# Altium PCB PCB_Medical_V2_2_2022-05-04.pcbdoc
Units mil, origin at the board's own origin, x right, y up, seen from the top; angles counter-clockwise.
Board outline 3436 x 4186 mil, 2 copper layers (Top Layer, Bottom Layer); 107 components, 72 nets, 382 pads, 205 vias.
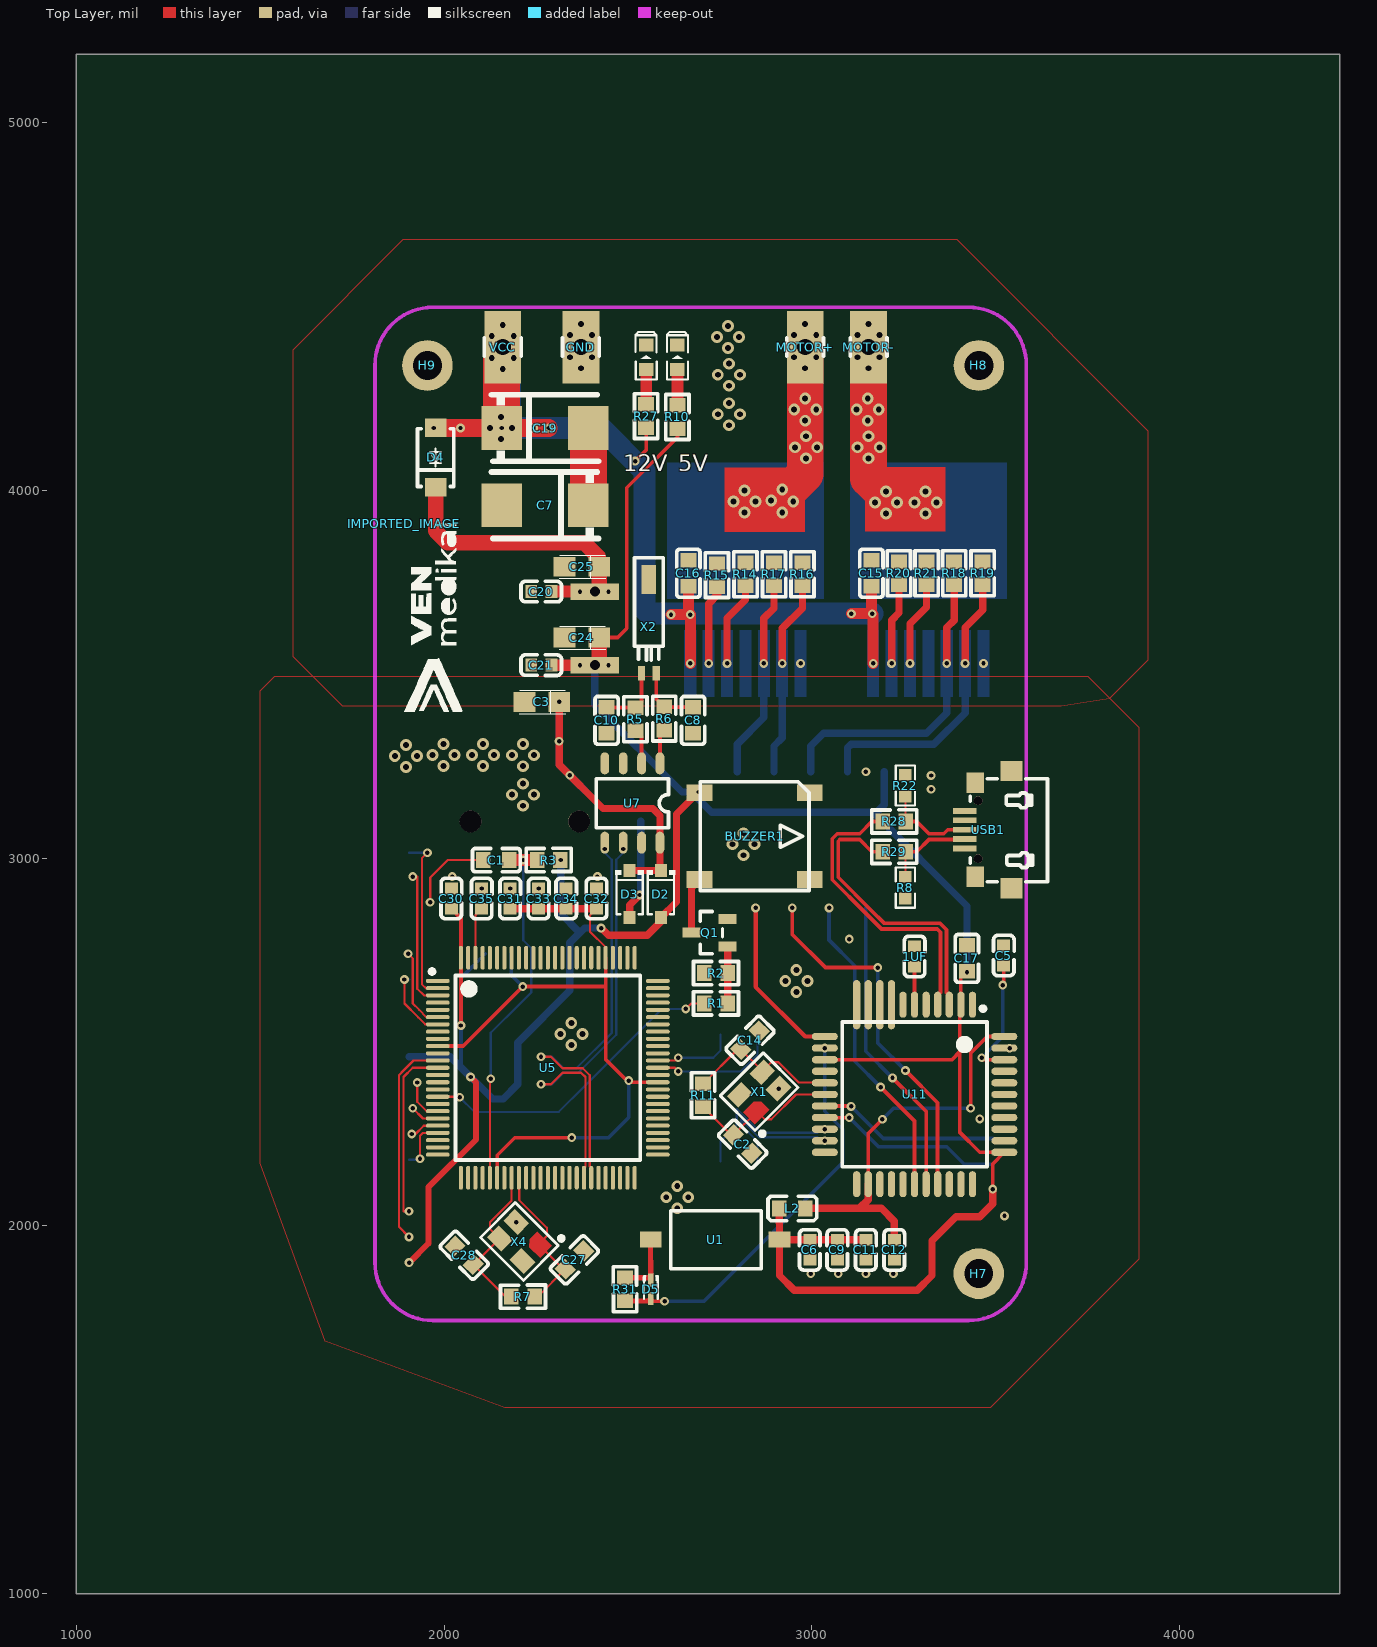
[diagram p0: Top Layer view]
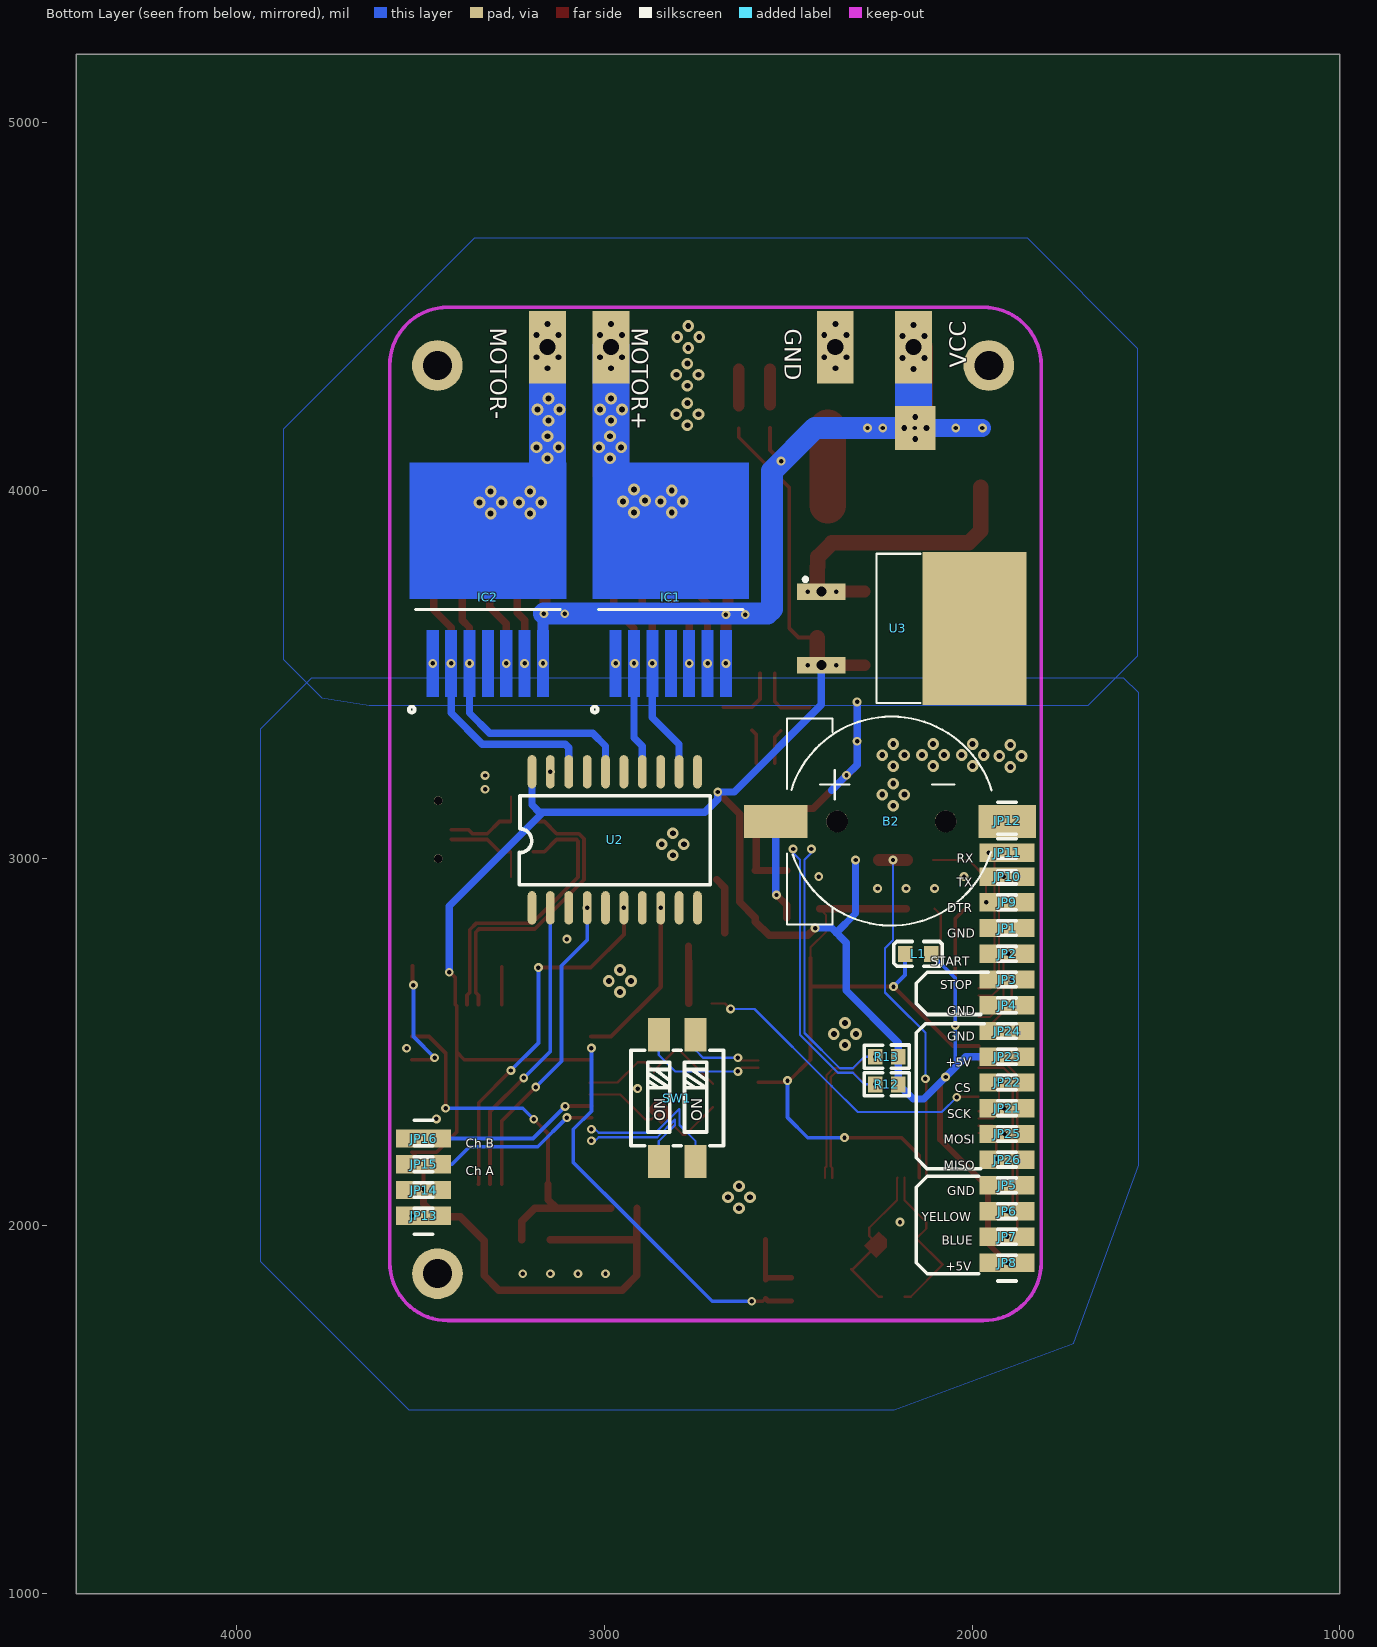
[diagram p1: Bottom Layer view, seen from below]

## Layer stack, top to bottom
Top Layer: signal copper (thickness not stored)
Dielectric: dielectric 12.6, FR-4, Dk 4.8
Bottom Layer: signal copper (thickness not stored)

## Board outline
4436,1000 1000,1000 1000,5186 4436,5186

## Components (designator, comment, footprint, x,y, rotation, side; value= is the part's Value field where it differs from the comment)
1UF "1uF" C0603#1 3279.5,2732.5 r270 top
5V "LED-0603_R" LED0603_RED 2634.5,4362.5 r90 top
12V "LED-0603_R" LED0603_RED 2549.5,4362.5 r90 top
B2 "CR1220-2" BAT-SMD_CR1220-2 2219.5,3100 r0 bottom
BUZZER1 "BUZZER 7.5X7.5X2.5MM" SMD-BUZZER-7.5X7.5X2.5 2844.5,3060 r0 top
C1 "100n" C0603#2 2142,2995 r180 top
C2 "22p" C0603#2 2812,2222.5 r135 top
C3 "10uF" CASE-A_3216 2265.59,3425 r180 top
C5 "100n" C0603#1 3522,2735 r270 top
C6 "100n" C0603#1 2994.5,1935 r90 top
C7 "220uF" CASE-D_7343 2274.5,3960 r0 top
C8 "10p" C0603#2 2677,3375 r90 top
C9 "100n" C0603#1 3069.5,1935 r90 top
C10 "10p" C0603#2 2442,3375 r90 top
C11 "100n" C0603#1 3147,1935 r90 top
C12 "10u" C0603#1 3224.5,1935 r90 top
C14 "22p" C0603#2 2832,2505 r225 top
C15 "470n" C0603#2 3162.05,3774.99 r270 top
C16 "470n" C0603#2 2664.5,3775 r270 top
C17 "100n" C0603#2 3422,2727.5 r90 top
C19 "220uF" CASE-D_7343 2274.5,4170 r180 top
C20 "100n" C0603#1 2264.5,3725 r0 top
C21 "100n" C0603#1 2264.5,3525 r0 top
C24 "0.33uF" CASE-A_3216 2374.5,3600 r180 top
C25 "0.1uF" CASE-A_3216 2374.5,3792.5 r180 top
C27 "22p" C0603#2 2354.5,1907.5 r225 top
C28 "22p" C0603#2 2054.5,1920 r315 top
C30 "10u" C0603#1 2019.5,2890 r270 top
C31 "100nF" C0603#1 2179.5,2890 r270 top
C32 "100nF" C0603#1 2414.5,2890 r270 top
C33 "100nF" C0603#1 2257,2890 r270 top
C34 "100nF" C0603#1 2332,2890 r270 top
C35 "100nF" C0603#1 2102,2890 r270 top
D2 "1N4148W" SOD-123_L3.1-W1.7-LS3.7-RD 2589.5,2902.5 r270 top
D3 "1N4148W" SOD-123_L3.1-W1.7-LS3.7-RD 2504.5,2902.5 r270 top
D4 "M7" SMA(DO-214AC) 1977,4090 r270 top
D5 "MMBD4148TS" SOD-523_L1.2-W0.8-LS1.6-RD 2562,1827.5 r270 top
GND "M01PTH_LONGPAD" 1X01_LONGPAD#1 2372,4390 r0 top
H7 "3_2MMMOUNTHOLE COPY" HOLE_2 3454,1870 r0 top
H8 "3_2MMMOUNTHOLE COPY" HOLE_2 3454.5,4340 r0 top
H9 "3_2MMMOUNTHOLE COPY" HOLE_2 1954.5,4340 r0 top
IC1 "BTS7960B-BTS7960B" PG-TO263-7 2869.5,3690 r180 bottom
IC2 "BTS7960B-BTS7960B" PG-TO263-7 3367,3690 r180 bottom
IMPORTED_IMAGE "IMPORTED_IMAGE" IMPORTED_IMAGE 1892.17,3910.12 r0 top
JP1 "M01PTH_LONGPAD" 1X01_LONGPAD#2 1904.91,2810 r90 bottom
JP2 "M01PTH_LONGPAD" 1X01_LONGPAD#2 1904.91,2740 r90 bottom
JP3 "M01PTH_LONGPAD" 1X01_LONGPAD#2 1904.91,2670 r90 bottom
JP4 "M01PTH_LONGPAD" 1X01_LONGPAD#2 1904.91,2600 r90 bottom
JP5 "M01PTH_LONGPAD" 1X01_LONGPAD#2 1904.91,2110 r90 bottom
JP6 "M01PTH_LONGPAD" 1X01_LONGPAD#2 1904.91,2040 r270 bottom
JP7 "M01PTH_LONGPAD" 1X01_LONGPAD#2 1904.91,1970 r270 bottom
JP8 "M01PTH_LONGPAD" 1X01_LONGPAD#2 1904.91,1900 r270 bottom
JP9 "M01PTH_LONGPAD" 1X01_LONGPAD#2 1904.91,2880 r270 bottom
JP10 "M01PTH_LONGPAD" 1X01_LONGPAD#2 1904.91,2950 r270 bottom
JP11 "M01PTH_LONGPAD" 1X01_LONGPAD#2 1904.91,3015 r270 bottom
JP12 "M01PTH_LONGPAD" 1X01_LONGPAD#2 1904.91,3102.5 r270 bottom
JP13 "M01PTH_LONGPAD" 1X01_LONGPAD#2 3492,2027.5 r90 bottom
JP14 "M01PTH_LONGPAD" 1X01_LONGPAD#2 3492,2097.5 r90 bottom
JP15 "M01PTH_LONGPAD" 1X01_LONGPAD#2 3492,2167.5 r90 bottom
JP16 "M01PTH_LONGPAD" 1X01_LONGPAD#2 3492,2237.5 r90 bottom
JP21 "M01PTH_LONGPAD" 1X01_LONGPAD#2 1904.91,2320 r270 bottom
JP22 "M01PTH_LONGPAD" 1X01_LONGPAD#2 1904.91,2390 r270 bottom
JP23 "M01PTH_LONGPAD" 1X01_LONGPAD#2 1904.91,2460 r270 bottom
JP24 "M01PTH_LONGPAD" 1X01_LONGPAD#2 1904.91,2530 r270 bottom
JP25 "M01PTH_LONGPAD" 1X01_LONGPAD#2 1904.91,2250 r270 bottom
JP26 "M01PTH_LONGPAD" 1X01_LONGPAD#2 1904.91,2180 r270 bottom
L1 "10uH" L0603#1 2147,2740 r0 bottom
L2 "30mOhm" L0603#2 2947,2047.5 r180 top
MOTOR+ "M01PTH_LONGPAD" 1X01_LONGPAD#1 2982,4390 r0 top
MOTOR- "M01PTH_LONGPAD" 1X01_LONGPAD#1 3154.5,4390 r0 top
Q1 "2222ALT1G" SOT-23-3_L2.9-W1.3-P1.90-LS2.4-BR 2722,2797.5 r0 top
R1 "820" R0603#1 2739.5,2605 r0 top
R2 "47k" R0603#1 2739.5,2687.5 r0 top
R3 "10k" R0603#1 2284.5,2995 r0 top
R5 "40.2k" R0603#1 2520.2,3377.93 r270 top
R6 "40.2k" R0603#1 2598.6,3379.77 r270 top
R7 "1M" R0603#1 2214.5,1807.5 r180 top
R8 "CG0603MLC-05E" R0603#2 3254.5,2920 r270 top
R10 "1k" R0603#1 2634.5,4200 r90 top
R11 "1M" R0603#1 2704.5,2355 r90 top
R12 "10k" R0603#3 2232,2385 r0 bottom
R13 "10k" R0603#3 2232,2460 r0 bottom
R14 "10k" R0603#1 2819.5,3772.5 r270 top
R15 "10k" R0603#1 2742,3770 r270 top
R16 "10k" R0603#1 2974.5,3772.5 r270 top
R17 "10k" R0603#1 2897,3772.5 r270 top
R18 "10k" R0603#1 3387,3775 r270 top
R19 "10k" R0603#1 3464.5,3775 r270 top
R20 "10k" R0603#1 3237,3775 r270 top
R21 "10k" R0603#1 3312,3775 r270 top
R22 "CG0603MLC-05E" R0603#2 3254.5,3197.5 r90 top
R27 "1k" R0603#1 2549.5,4202.5 r90 top
R28 "22" R0603#1 3224.5,3100 r180 top
R29 "22" R0603#1 3224.5,3017.5 r180 top
R31 "10k" R0603#1 2492,1827.5 r90 top
SW1 "DM-02-V" SW-SMD_DM-02-V 2802,2347.5 r180 bottom
U1 "DM-01-V" DM-01-V 2912,1962.5 r90 top
U2 "74HC244D,653" SOIC-20_L13.0-W7.6-P1.27-LS10.6-BL 2972,3050 r0 bottom
U3 "L7805CD2T-TR" TO-263-2_L10.0-W9.1-P5.08-LS15.2-TL 2202,3625 r0 bottom
U5 "ATMEGA2560-16AU" TQFP-100_L14.0-W14.0-P0.50-LS16.0-BL 2282,2430 r270 top
U7 "PCF8563T/5,518" SOIC-8_L5.0-W4.0-P1.27-LS6.0-BL 2512,3150 r180 top
U11 "ATMEGA32U4-AU" QFP-44_L10.0-W10.0-P0.80-LS13.2-BL 3279.5,2357.5 r180 top
USB1 "U-F-M5SS-W-3" MICRO-USB-SMD_MICRO-USB-A11 3479.5,3077.5 r90 top
VCC "M01PTH_LONGPAD" 1X01_LONGPAD#1 2159.5,4390 r0 top
X1 "16MHz" OSC-SMD_4P-L3.2-W2.5-BL 2857,2365 r45 top
X2 "32.768KHz" OSC-TH_BD2.0-P0.70-D0.3 2557,3517.5 r270 top
X4 "16MHz" OSC-SMD_4P-L3.2-W2.5-BL 2204.5,1957.5 r135 top

## Footprints (in the part's own frame and the unit in brackets; to place one, negate y for a bottom-side part, rotate by r counter-clockwise, add the part's x,y. Pads: shape width x height; smd on the part's side, far side on the other; paste and mask are expansions set on the pad)
1X01_LONGPAD#1 [mil]
  rect 100x196.85 hole 44: 1(0,0)
  silkscreen extent -50,-25 50,25
1X01_LONGPAD#2 [mil]
  rect 50x150 smd: 1(0,0)
  silkscreen extent -50,-25 50,25
BAT-SMD_CR1220-2 [mm]
  rect 4.4x2.3 smd: 1(8,0)
  rect 4x2.3 smd: 2(-8,0)
  round 1.5 hole 1.5 unplated: ""(-3.75,0) ""(3.75,0)
  silkscreen extent -6.92,-7.25 7.22,7.19
C0603#1 [mm]
  rect 0.8x0.9 smd: 1(-0.7,0) 2(0.7,0)
  silkscreen extent -1.41,-0.71 1.39,0.72
C0603#2 [mm]
  rect 1x1.1 smd: 1(-0.9,0) 2(0.9,0)
  silkscreen extent -1.65,-0.8 1.65,0.8
CASE-A_3216 [mil]
  rect 59.05x53.5 smd: 1(-47.24,0) 2(47.25,0)
  silkscreen extent -65,-30 61,33
CASE-D_7343 [mil]
  rect 110.2x118.5 smd: 1(118.11,0) 2(-118.11,0)
  silkscreen extent -146,-91 146,91
DM-01-V [mm]
  rect 1.1x1.5 smd: 1(0,0) 2(0,8.9)
  silkscreen extent -2,1.25 2,7.5
HOLE_2 [mm]
  round 3.5 hole 2: 1(0,0)
IMPORTED_IMAGE [mil]
  silkscreen extent 0,-512 157,0
L0603#1 [mm]
  rect 1x1.1 smd: 1(0.9,0) 2(-0.9,0)
  silkscreen extent -1.68,-0.85 1.68,0.85
L0603#2 [mm]
  rect 1x1.1 smd: 1(-0.9,0) 2(0.9,0)
  silkscreen extent -1.68,-0.85 1.68,0.85
LED0603_RED [mm]
  rect 0.9x1 smd: 1(-0.85,0) 2(0.85,0)
  silkscreen extent -1.54,-0.73 1.75,0.73
MICRO-USB-SMD_MICRO-USB-A11 [mm]
  rect 0.4x1.6 smd: 1(-1.3,1.616) 2(-0.65,1.616) 3(0,1.616) 4(0.65,1.616) 5(1.3,1.616)
  rect 1.4x1.2 smd: 6(3.25,0.893) 7(-3.25,0.893)
  rect 1.4x1.5 smd: 8(-4.051,-1.617) 9(4.051,-1.617)
  round 0.6 hole 0.6 unplated: ""(-2,0.694) ""(2,0.694)
  silkscreen extent -3.59,-4.1 3.52,1.24
OSC-SMD_4P-L3.2-W2.5-BL [mm]
  round 0 smd: 1(-1.1,-0.8)
  rect 1.4x1.15 smd: 2(1.1,-0.8) 3(1.1,0.8) 4(-1.1,0.8)
  Top Layer region: -1.8,-0.225 -0.762,-0.225 -0.4,-0.604 -0.4,-1.375 -1.8,-1.375
  silkscreen extent -2.1,-2.35 2.1,1.7
OSC-TH_BD2.0-P0.70-D0.3 [mm]
  rect 1x0.5 smd: 1(0.381,0.508) 2(0.381,-0.508)
  rect 2x1 smd: ""(-6.096,0)
  silkscreen extent -7.6,-1 -0.54,1
PG-TO263-7 [mil]
  round 0 smd: 1(-99.99,-160.24) 2(-49.99,-160.24) 3(0.01,-160.24) 4(50.01,-160.24) 5(100.01,-160.24) 6(150.01,-160.24) 7(200.01,-160.24) 8(50.01,199.99)
  Top Layer region: -115.74,-69.69 -84.24,-69.69 -84.24,-250.79 -115.74,-250.79
  Top Layer region: -65.74,-69.69 -34.24,-69.69 -34.24,-250.79 -65.74,-250.79
  Top Layer region: -15.74,-69.69 15.76,-69.69 15.76,-250.79 -15.74,-250.79
  Top Layer region: 34.26,-69.69 65.76,-69.69 65.76,-250.79 34.26,-250.79
  Top Layer region: 84.26,-69.69 115.76,-69.69 115.76,-250.79 84.26,-250.79
  Top Layer region: 134.26,-69.69 165.76,-69.69 165.76,-250.79 134.26,-250.79
  Top Layer region: 184.26,-69.69 215.76,-69.69 215.76,-250.79 184.26,-250.79
  Top Layer region: -162.59,14.95 -162.59,385.03 262.61,385.03 262.61,14.95
  silkscreen extent -165,-294 247,-14
QFP-44_L10.0-W10.0-P0.80-LS13.2-BL [mm]
  oval 0.5x1.8 smd: 1(-4,-6.2) 2(-3.2,-6.2) 3(-2.4,-6.2) 4(-1.6,-6.2) 5(-0.8,-6.2) 6(0,-6.2) 7(0.8,-6.2) 23(4,6.2) 24(3.2,6.2) 25(2.4,6.2) 26(1.6,6.2) 27(0.8,6.2) 28(0,6.2) 29(-0.8,6.2) 30(-1.6,6.2) 31(-2.4,6.2) 32(-3.2,6.2) 33(-4,6.2)
  oval 0.5x3.4 smd: 8(1.6,-6.2) 9(2.4,-6.2) 10(3.2,-6.2) 11(4,-6.2)
  oval 1.8x0.5 smd: 12(6.2,-4) 13(6.2,-3.2) 14(6.2,-2.4) 15(6.2,-1.6) 16(6.2,-0.8) 17(6.2,0) 18(6.2,0.8) 19(6.2,1.6) 20(6.2,2.4) 21(6.2,3.2) 22(6.2,4) 34(-6.2,4) 35(-6.2,3.2) 36(-6.2,2.4) 37(-6.2,1.6) 38(-6.2,0.8) 39(-6.2,0) 40(-6.2,-0.8) 41(-6.2,-1.6) 42(-6.2,-2.4) 43(-6.2,-3.2) 44(-6.2,-4)
  silkscreen extent -5,-6.08 5,5
R0603#1 [mm]
  rect 1x1.1 smd: 1(-0.8,0) 2(0.8,0)
  silkscreen extent -1.55,-0.8 1.55,0.81
R0603#2 [mm]
  rect 0.806x0.864 smd: 1(-0.753,0) 2(0.753,0)
  silkscreen extent -1.39,-0.66 1.39,0.66
R0603#3 [mm]
  rect 1x1.1 smd: 1(0.8,0) 2(-0.8,0)
  silkscreen extent -1.55,-0.81 1.55,0.8
SMA(DO-214AC) [mil]
  rect 50x57.9 smd: 1(-81,0) 2(81,0)
  silkscreen extent -78,-49 79,49
SMD-BUZZER-7.5X7.5X2.5 [mm]
  rect 1.78x1.15 smd: 1(-3.8,3) 2(-3.8,-3) 3(3.8,-3) 4(3.8,3)
  silkscreen extent -3.75,-3.75 3.75,3.75
SOD-123_L3.1-W1.7-LS3.7-RD [mm]
  rect 0.91x0.84 smd: 1(-1.63,0) 2(1.63,0)
  silkscreen extent -1.63,-0.98 1.4,0.98
SOD-523_L1.2-W0.8-LS1.6-RD [mm]
  rect 0.93x0.36 smd: 1(-0.635,0) 2(0.635,0)
  silkscreen extent -0.91,-0.55 0.68,0.55
SOIC-8_L5.0-W4.0-P1.27-LS6.0-BL [mm]
  oval 0.6x1.52 smd: 1(-1.905,-2.74) 2(-0.635,-2.74) 3(0.635,-2.74) 4(1.905,-2.74) 5(1.905,2.74) 6(0.635,2.74) 7(-0.635,2.74) 8(-1.905,2.74)
  silkscreen extent -2.49,-1.67 2.5,1.7
SOIC-20_L13.0-W7.6-P1.27-LS10.6-BL [mm]
  oval 0.6x2.3 smd: 1(5.715,4.7) 2(4.445,4.7) 3(3.175,4.7) 4(1.905,4.7) 5(0.635,4.7) 6(-0.635,4.7) 7(-1.905,4.7) 8(-3.175,4.7) 9(-4.445,4.7) 10(-5.715,4.7) 11(-5.715,-4.7) 12(-4.445,-4.7) 13(-3.175,-4.7) 14(-1.905,-4.7) 15(-0.635,-4.7) 16(0.635,-4.7) 17(1.905,-4.7) 18(3.175,-4.7) 19(4.445,-4.7) 20(5.715,-4.7)
  silkscreen extent -6.6,-3.05 6.6,3.1
SOT-23-3_L2.9-W1.3-P1.90-LS2.4-BR [mm]
  rect 1.25x0.7 smd: 1(1.25,-0.95) 2(1.25,0.95) 3(-1.25,0)
  silkscreen extent -0.65,-1.46 0.9,1.46
SW-SMD_DM-02-V [mil]
  rect 60x90 smd: 1(50,172.24) 2(-50,172.24) 3(-50,-172.24) 4(50,-172.24)
  silkscreen extent -126,-130 126,130
TO-263-2_L10.0-W9.1-P5.08-LS15.2-TL [mil]
  rect 132.23x44.65 hole 26.8: 1(208.1,-100) 3(208.1,100)
  rect 282.7x416 smd: 4(-208.1,0)
  silkscreen extent -61,-203 256,203
TQFP-100_L14.0-W14.0-P0.50-LS16.0-BL [mm]
  oval 0.28x1.65 smd: 1(-6,-7.6) 2(-5.5,-7.6) 3(-5,-7.6) 4(-4.5,-7.6) 5(-4,-7.6) 6(-3.5,-7.6) 7(-3,-7.6) 8(-2.5,-7.6) 9(-2,-7.6) 10(-1.5,-7.6) 11(-1,-7.6) 12(-0.5,-7.6) 13(0,-7.6) 14(0.5,-7.6) 15(1,-7.6) 16(1.5,-7.6) 17(2,-7.6) 18(2.5,-7.6) 19(3,-7.6) 20(3.5,-7.6) 21(4,-7.6) 22(4.5,-7.6) 23(5,-7.6) 24(5.5,-7.6) 25(6,-7.6) 51(6,7.6) 52(5.5,7.6) 53(5,7.6) 54(4.5,7.6) 55(4,7.6) 56(3.5,7.6) 57(3,7.6) 58(2.5,7.6) 59(2,7.6) 60(1.5,7.6) 61(1,7.6) 62(0.5,7.6) 63(0,7.6) 64(-0.5,7.6) 65(-1,7.6) 66(-1.5,7.6) 67(-2,7.6) 68(-2.5,7.6) 69(-3,7.6) 70(-3.5,7.6) 71(-4,7.6) 72(-4.5,7.6) 73(-5,7.6) 74(-5.5,7.6) 75(-6,7.6)
  oval 1.65x0.28 smd: 26(7.6,-6) 27(7.6,-5.5) 28(7.6,-5) 29(7.6,-4.5) 30(7.6,-4) 31(7.6,-3.5) 32(7.6,-3) 33(7.6,-2.5) 34(7.6,-2) 35(7.6,-1.5) 36(7.6,-1) 37(7.6,-0.5) 38(7.6,0) 39(7.6,0.5) 40(7.6,1) 41(7.6,1.5) 42(7.6,2) 43(7.6,2.5) 44(7.6,3) 45(7.6,3.5) 46(7.6,4) 47(7.6,4.5) 48(7.6,5) 49(7.6,5.5) 50(7.6,6) 76(-7.6,6) 77(-7.6,5.5) 78(-7.6,5) 79(-7.6,4.5) 80(-7.6,4) 81(-7.6,3.5) 82(-7.6,3) 83(-7.6,2.5) 84(-7.6,2) 85(-7.6,1.5) 86(-7.6,1) 87(-7.6,0.5) 88(-7.6,0) 89(-7.6,-0.5) 90(-7.6,-1) 91(-7.6,-1.5) 92(-7.6,-2) 93(-7.6,-2.5) 94(-7.6,-3) 95(-7.6,-3.5) 96(-7.6,-4) 97(-7.6,-4.5) 98(-7.6,-5) 99(-7.6,-5.5) 100(-7.6,-6)
  silkscreen extent -6.8,-8.15 6.37,6.37

## Free pads (board coordinates)
  rect 110.2x118.5 smd far side: 1(2154.5,4170)

## Via types
v1: diameter 32, hole 16, Top Layer to Bottom Layer, tented both sides, 108 vias
v2: diameter 24, hole 12, Top Layer to Bottom Layer, tented both sides, 97 vias

## Nets (pads, with @x,y where several pads share a name; then routed paths per layer and width w, separated by ;. In a path a pad name is that pad's centre, name@x,y a point inside that pad or via, vN(x,y) a via of type N, cw(c..) or ccw(c..) an arc to the next point about the centre after c; other vN are vias at no path point)
+5V: BUZZER1.1 C6.2 C9.2 C11.2 C17.1 C21.2 C24.1 C30.2 D2.2 JP8.1 JP14.1 JP23.1 L1.2 L2.2 R3.2 R10.1 R12.2 R13.2 U1.1 U2.20 U3.3 U5.100 U11.2 U11.14 U11.34 | length 7870.8
  Top Layer w10: C30.2 2045.78,2836.16 U5.100 v2(2045.78,2545) ; C24.1 2472,3600 2497,3625 2497,4007.5 2634.5,4145 R10.1 ; U11.14 3381.09,2451.99 3402,2472.9 ; C17.1 3405.48,2675.55 U11.2 3402,2598.11 3402,2255 3456.98,2200.02 U11.34 3492,2168.43 v2(3492,2100)
  Top Layer w16: v2(1904.91,1900) 1957,1952.1 1957,2105 2087,2235 2087,2350 2087,2390 v2(2072,2405)
  Top Layer w20: R3.2 v2(2317,2995) ; v2(2427,2810) 2447,2790 2552,2790 2589.5,2827.5 D2.2 2632,2880.82 2632,3120 v2(2692,3180) ; L2.2 U1.1 ; C6.2 C9.2 C11.2 ; C6.2 U1.1 ; v2(3422,2690) C17.1 ; v2(3492,2100) 3492,2060 3457,2025 3392,2025 3327,1960 3327,1865 3287,1825 2952,1825 2912,1865 U1.1
  Top Layer w32: C21.2 U3.3
  Top Layer w42: U3.3 2421.74,3536.63 C24.1
  Bottom Layer w10: 2045.78,2432.8 v2(2045.78,2545) 2045.78,2674.22 L1.2
  Bottom Layer w16: v2(2072,2405) 2083.03,2393.97
  Bottom Layer w20: JP23.1 2017,2460 2132,2345 2160.5,2345 R12.2 R13.2 2200.5,2498.5 2342,2640 2342,2770 2382,2810 v2(2427,2810) ; v2(2317,2995) 2317,2849.5 2369.25,2797.25 ; U3.3 2410.1,3416.9 2647,3180 v2(2692,3180) 2692,3160 2727,3125 3177,3125 3197,3145 U2.20 ; 3105.56,3125 3167,3125 3422,2870 v2(3422,2690)
  other v2: 2369.5,3525 2447,3525
AREF1: C35.2 U5.98 | length 140.2
  Top Layer w6: U5.98 2085.15,2845.59 C35.2
BUZZER: R1.1 U5.17 | length 864.5
  Top Layer w6: U5.17 2040.74,2351.26 v2(2042,2350) ; v2(2657,2590) 2672,2605 R1.1
  Bottom Layer w6: v2(2042,2350) 2082,2310 2197,2310 2312,2310 2382,2380 2592,2590 v2(2657,2590)
C7_1: C7.1 C19.2 | length 210
  Top Layer w100: C7.1 C19.2
CRYSTAL_3: C2.2 R11.1 U11.17 X1.1 | length 751.9
  Top Layer w6: R11.1 2780.45,2247.56 C2.2 ; C2.2 2848.65,2309.26 ; C2.2 2848.65,2309.26 ; 2848.65,2309.26 X1.1 ; 2848.65,2309.26 X1.1 ; X1.1 2849.9,2312.1 ; X1.1 2849.9,2312.1 ; 2849.9,2312.1 2872,2290 ; 2849.9,2312.1 2872,2290 ; 2872,2290 2889.5,2290 ; 2872,2290 2889.5,2290 ; 2889.5,2290 2957,2357.5 ; 2889.5,2290 2957,2357.5 ; 2957,2357.5 3040.41,2357.5 2957,2357.5
CRYSTAL_4: C14.2 R11.2 U11.16 X1.3 | length 438.6
  Top Layer w6: R11.2 2797.95,2479.94 C14.2 2865.35,2421.54 X1.3 2865.35,2420.85 2889.5,2445 2909.5,2445 2964.5,2390 3039.41,2390 U11.16@3040.41,2389
D3_1: C3.1 D2.1 D3.1 U7.8 | length 1005.7
  Top Layer w20: v2(2312.84,3425) 2312.84,3254.16 2432,3135 2567,3135 2587,3115 U7.8 2587,2969.17 D2.1 D3.1
  Bottom Layer w20: v2(2312.84,3425) v2(2312.8,3317.92) 2312.8,3254.2 v2(2341.54,3225.46) 2382,3185
D3_2: B2.1 D3.2 | length 274.1
  Top Layer w20: D3.2 2504.5,2872.5 v2(2532,2900)
  Bottom Layer w20: v2(2532,2900) 2534.46,2902.46 B2.1
D+: R22.1 R28.1 USB1.3 | length 246.5
  Top Layer w6: R22.1 3254.5,3101.5 R28.1
  Top Layer w10: R28.1 3285.68,3100 3318.93,3066.75 3358.93,3066.75 3369.68,3077.5 USB1.3
D-: R8.1 R29.1 USB1.2 | length 242.6
  Top Layer w6: R8.1 3254.5,3016 R29.1
  Top Layer w10: R29.1 3285.68,3017.5 3318.93,3050.75 3414.71,3050.75 USB1.2
DTR: C1.2 JP9.1 | length 231.7
  Top Layer w6: v2(1962,2880) 1962,2947.5 2009.5,2995 C1.2
EN_CHA: JP15.1 U11.19 | length 509.2
  Top Layer w10: U11.19 v2(3102,2294.51)
  Bottom Layer w10: v2(3102,2294.51) 3181.51,2215 3367,2215 3414.5,2167.5 JP15.1
EN_CHB: JP16.1 U11.18 | length 493.2
  Top Layer w10: U11.18 3106,2326 v2(3107,2325)
  Bottom Layer w10: v2(3107,2325) 3194.5,2237.5 JP16.1
GND: 1UF.1 5V.2 12V.2 B2.2 C2.1 C3.2 C5.1 C6.1 C7.2 C8.1 C9.1 C10.1 C11.1 C12.1 C14.1 C15.1 C16.1 C17.2 C20.1 C21.1 C24.2 C25.2 C27.1 C28.1 C30.1 C31.1 C32.1 C33.1 C34.1 C35.1 GND.1 H7.1 H8.1 H9.1 IC1.1 IC2.1 JP1.1 JP4.1 JP5.1 JP12.1 JP13.1 JP24.1 Q1.2 R2.1 R8.2 R14.1 R15.1 R16.1 R17.1 R18.1 R19.1 R20.1 R21.1 R22.2 U2.1 U2.10 U2.11 U2.13 U2.15 U2.17 U2.19 U3.4 U5.11 U5.32 U5.62 U5.81 U5.99 U7.4 U11.5 U11.15 U11.23 U11.35 U11.43 USB1.5 USB1.6 USB1.7 USB1.8 USB1.9 X1.2 X1.4 X4.2 X4.4
  other v1: 2634,2048 2604,2078 2664,2078 2634,2108 2346,2492 2316,2522 2376,2522 2346,2552 2958,2636 2928,2666 2988,2666 2958,2696 2814,3008 2784,3038 2844,3038 2814,3068 2214.37,3142.75 2184.37,3172.75 2244.37,3172.75 2214.37,3202.75 1896,3248 1998.5,3250.5 2106,3250.5 2214.37,3250.25 1866,3278 1926,3278 1968.5,3280.5 2028.5,3280.5 2076,3280.5 2136,3280.5 2184.37,3280.25 2244.37,3280.25 1896,3308 1998.5,3310.5 2106,3310.5 2214.37,3310.25 2774.5,4177.5 2744.5,4207.5 2804.5,4207.5 2774.5,4237.5 2774.5,4285 2744.5,4315 2804.5,4315 2372,4332.5 2774.5,4345 2342,4362.5 2402,4362.5 2772,4387.5 2742,4417.5 2802,4417.5 2342,4422.5 2402,4422.5 2772,4447.5 2372,4452.5
  other v2: 2997,1870 3072,1870 3147,1870 3222,1870 2196.15,2010.39 3524,2027 3457,2291 2909.89,2373.35 3538,2483 3102,2780 2102,2917.56 2179.5,2917.56 2257,2917.56 2022,2950 2417,2950 3324.5,3187.5 3324.5,3225 3147,3235.04 2969.49,3529.76 3466.99,3529.76
I2C+: R13.1 U5.44 U7.5 | length 1187.6
  Top Layer w6: v2(2263.49,2460) 2290.46,2460 2321.96,2428.5 2361.96,2428.5 2377.39,2428.5 2396.27,2409.62 2396.27,2201.6 2396.27,2161.6 2400.11,2157.76 U5.44
  Bottom Layer w6: v2(2263.49,2460) 2293.18,2460 2324.68,2428.5 2359.71,2428.5 2456,2524.79 2456,2956 2456,2996 2437,3015 v2(2437,3025)
I2C-: R12.1 U5.43 U7.6 | length 1187.6
  Top Layer w6: v2(2263.49,2385) 2290.46,2385 2321.96,2416.5 2361.96,2416.5 2372.42,2416.5 2384.27,2404.65 2384.27,2201.6 2384.27,2161.6 2380.43,2157.76 U5.43
  Bottom Layer w6: v2(2263.49,2385) 2293.18,2385 2324.68,2416.5 2364.68,2416.5 2468,2519.82 2468,2956 2468,2996 2487,3015 v2(2487,3025)
IC1_5: IC1.5 R14.2 | length 231.9
  Top Layer w20: v2(2769.49,3529.76) 2769.5,3652.5 2819.5,3702.5 R14.2
IC1_6: IC1.6 R15.2 | length 220.1
  Top Layer w20: v2(2719.49,3529.76) 2719.49,3692.49 2744.5,3717.5 2742,3720 R15.2
IC1_IN: IC2.2 R19.2 U2.18 | length 792.6
  Top Layer w20: v2(3416.99,3529.76) 3416.99,3627.49 3464.5,3675 R19.2
  Bottom Layer w20: U2.18 3097,3300 3107,3310 3332,3310 3417,3395 v2(3416.99,3529.76)
IC1_INH: IC2.3 R18.2 U2.16 | length 834
  Top Layer w20: v2(3366.99,3529.76) 3366.99,3627.5 3387,3647.51 R18.2
  Bottom Layer w20: U2.16 2997,3305 3032,3340 3312,3340 3366.99,3394.99 v2(3366.99,3529.76)
IC2_IN: IC1.2 R16.2 U2.14 | length 538.1
  Top Layer w20: v2(2919.49,3529.76) 2919.49,3624.99 2974.5,3680 R16.2
  Bottom Layer w20: U2.14 2897,3305 2919.49,3327.49 v2(2919.49,3529.76)
IC2_INH: IC1.3 R17.2 U2.12 | length 547.3
  Top Layer w20: v2(2869.49,3529.76) 2869.5,3652.5 2897,3680 R17.2
  Bottom Layer w20: U2.12 2797,3310 2869.49,3382.49 v2(2869.49,3529.76)
L1_1: C31.2 C32.2 C33.2 C34.2 L1.1 U5.10 U5.31 U5.61 U5.80 | length 2024.7
  Top Layer w6: C32.2 2397,2844.9 2397,2800 2439.5,2757.5 U5.80
  Top Layer w10: U5.10 2052,2489.06 v2(2213.8,2650.86) 2439.48,2650.86 ; U5.31 2144.2,2192.2 2192,2240 v2(2347,2240) ; U5.80 2439.48,2452.52 2501.37,2390.63 U5.61
  Top Layer w20: C31.2 C33.2 C34.2 C32.2
  Bottom Layer w10: L1.1 2182.43,2682.24 v2(2213.8,2650.86) ; v2(2347,2240) 2447,2240 2502,2295 v2(2502,2395)
L2_1: C12.2 L2.1 U11.24 U11.44 | length 1104.6
  Top Layer w10: U11.24 3153.52,2251.52 v2(3192,2290) ; v2(3432,2320) 3432,2470 3477,2515 U11.44
  Top Layer w20: L2.1 3129.5,2047.5 3153.5,2071.5 U11.24 ; 3112.44,2047.5 3189.5,2047.5 3224.5,2012.5 C12.2
  Bottom Layer w10: v2(3192,2290) 3222,2320 v2(3432,2320)
L_EN: U2.8 U11.12 | length 459.3
  Top Layer w12: v2(2847,2864.96) 2847,2650 2982.02,2514.98 U11.12
L_PWM: U2.6 U11.30 | length 998.8
  Top Layer w10: v2(2947,2864.96) 2947,2792.5 3037,2702.5 v2(3179.5,2702.5) ; v2(3254.5,2422.5) 3342,2335 3342,2277.5 3342,2113.9 U11.30
  Bottom Layer w10: v2(3179.5,2702.5) 3179.5,2497.5 v2(3254.5,2422.5)
LEO_UART+: SW1.3 U11.21 | length 383.6
  Bottom Layer w6: SW1.3@2852,2175.25 2852,2230.26 2808,2274.26 2808,2289.28 2856.02,2241.26 2975.66,2241.26 3015.66,2241.26 3025.41,2231.52 v2(3035.4,2231.5)
LEO_UART-: SW1.4 U11.20 | length 431.6
  Bottom Layer w6: SW1.4@2752,2175.25 2752,2230.26 2796,2274.26 2796,2318.26 2860.99,2253.26 2975.66,2253.26 3015.66,2253.26 3025.41,2263.01 v2(3035.41,2263.01)
M+: IC1.8 MOTOR+.1 | length 1011.3
  Top Layer w100: 2912,3975 2982,4045 2982,4188.16 2982,4248.16 MOTOR+.1
  Bottom Layer w100: IC1.8 2982,4052.5 MOTOR+.1
  other v1: 2817,3940 2919.5,3940 2787,3970 2847,3970 2949.5,3970 2889.5,3972.5 2817,4000 2919.5,4002.5 2984.5,4087.5 2954.5,4117.5 3014.5,4117.5 2984.5,4147.5 2982,4190 2952,4220 3012,4220 2982,4250 2982,4332.5 2952,4362.5 3012,4362.5 2952,4422.5 3012,4422.5 2982,4452.5
M-: IC2.8 MOTOR-.1 | length 1006.1
  Top Layer w100: MOTOR-.1 3154.5,4032.5 3212,3975
  Bottom Layer w100: MOTOR-.1 3154.5,4052.48 IC2.8
  other v1: 3202,3937.5 3309.5,3937.5 3172,3967.5 3232,3967.5 3279.5,3967.5 3339.5,3967.5 3202,3997.5 3309.5,3997.5 3154.5,4087.5 3124.5,4117.5 3184.5,4117.5 3154.5,4147.5 3152,4190 3122,4220 3182,4220 3152,4250 3154.5,4332.5 3124.5,4362.5 3184.5,4362.5 3124.5,4422.5 3184.5,4422.5 3154.5,4452.5
MISO: JP26.1 U5.22 | length 144.8
  Top Layer w6: v2(1934.5,2182.5) 1934.5,2245.33 1942,2252.83 U5.22
  Bottom Layer w6: JP26.1 1932,2180 v2(1934.5,2182.5)
MOSI: JP25.1 U5.21 | length 87.2
  Top Layer w6: v2(1912,2250) 1922,2250 1944.52,2272.52 U5.21
  Bottom Layer w6: JP25.1 v2(1912,2250)
PIN2: JP2.1 U5.6 | length 226.8
  Top Layer w6: v2(1902,2740) 1914.5,2727.5 1914.5,2667.5 1914.5,2605 1932,2587.5 1951.7,2567.8 U5.6
  Bottom Layer w6: v2(1902,2740) JP2.1
PIN3: JP3.1 U5.7 | length 235.3
  Top Layer w6: v2(1892,2670) 1892,2605 1929.9,2567.1 ; 1899.5,2597.5 1948.9,2548.1 U5.7
  Bottom Layer w6: v2(1892,2670) JP3.1
Q1_3: BUZZER1.2 Q1.3 | length 153.5
  Top Layer w20: Q1.3 2672.8,2919.79 BUZZER1.2
R2_2: Q1.1 R1.2 R2.2 | length 155.1
  Top Layer w20: R1.2 R2.2 Q1.1
R10_2: 5V.1 R10.2 | length 97.5
  Top Layer w32: R10.2 5V.1
R20_2: IC2.6 R20.2 | length 222
  Top Layer w20: v2(3216.99,3529.76) 3217,3647.5 3237,3667.5 R20.2
R21_2: IC2.5 R21.2 | length 232.4
  Top Layer w20: v2(3266.99,3529.76) 3266.99,3637.49 3312,3682.5 R21.2
R27_2: 12V.1 R27.2 | length 95
  Top Layer w32: R27.2 12V.1
R31_2: D5.1 R31.2 U1.2 | length 365.4
  Top Layer w6: R31.2 2555.51,1858.99 D5.1 U1.2
  Top Layer w14: R31.2 2555.51,1858.99 D5.1 U1.2
R_EN: U2.4 U11.28 | length 847.9
  Top Layer w10: v2(3187,2377.5) 3279.5,2285 U11.28
  Bottom Layer w10: v2(3047,2864.96) 3047,2777.5 3117,2707.5 3117,2585 3117,2475 3117,2447.5 v2(3187,2377.5)
R_PWM: U2.2 U11.29 | length 819.5
  Top Layer w10: v2(3219.5,2402.5) 3311,2311 U11.29
  Bottom Layer w10: U2.2 3147,2475 v2(3219.5,2402.5)
RD+: R28.2 U11.4 | length 822.3
  Top Layer w10: R28.2 3163.32,3100 3130.07,3066.75 3090.07,3066.75 3069.49,3066.75 3055.78,3053.04 3055.78,2941.22 3144.5,2852.5 3189.5,2807.5 3334.5,2807.5 3341.36,2807.5 3350.24,2798.62 3350.24,2674.93 3350.24,2634.93 3342.49,2627.18 U11.4
RD-: R29.2 U11.3 | length 795.8
  Top Layer w10: R29.2 3163.32,3017.5 3130.07,3050.75 3090.07,3050.75 3076.12,3050.75 3071.78,3046.41 3071.78,2947.85 3160.5,2859.13 3196.13,2823.5 3334.5,2823.5 3347.98,2823.5 3366.24,2805.25 3366.24,2674.93 3366.24,2634.93 3373.99,2627.18 U11.3
RST: C1.1 R3.1 U5.30 | length 995.4
  Top Layer w6: U5.30 2124.5,2397.5 v2(2127,2400)
  Top Layer w32: C1.1 v2(2215.22,2995) R3.1
  Bottom Layer w6: v2(2127,2400) 2127,2525 2207,2605 2237,2635 2237,2755 2215.22,2776.78 v2(2215.22,2995)
RX2: JP7.1 U5.12 | length 573.6
  Top Layer w6: v2(1904.5,1970) 1877,1997.5 1877,2022.5 1877,2410 1889.5,2422.5 1916.68,2449.68 U5.12
RXF: JP10.1 U5.3 | length 380.8
  Top Layer w6: v2(1914.5,2950) 1927,2950 1927,2645 1945.15,2626.85 U5.3@1982.79,2626.85
S$19: 
S$21: 
S$25: 
S$27: 
S$30781: 
S$30783: 
S$30785: 
SCK: JP21.1 U5.20 | length 79.8
  Top Layer w6: v2(1914.5,2320) 1942.3,2292.2 U5.20
SS: JP22.1 U5.19 | length 116.4
  Top Layer w6: v2@1927,2387.5 1927,2337.5 1952.61,2311.89 U5.19
  other v2: 1927,2390
TX2: JP6.1 U5.13 | length 483.6
  Top Layer w6: v2(1904.5,2040) 1889.5,2040 1889.5,2405 1914.5,2430 U5.13
TXF: JP11.1 U5.2 | length 491.5
  Top Layer w6: 1939.5,2843.16 1939.5,3000 v2(1954.5,3015) ; 1939.5,2873.5 1939.5,2657.5 1950.46,2646.54 U5.2
  Bottom Layer w6: JP11.1 v2(1954.5,3015)
U3_1: C20.2 C25.1 D4.2 U3.1 | length 807.9
  Top Layer w32: C20.2 U3.1
  Top Layer w42: D4.2 1977,3890 2009.5,3857.5 2381.43,3857.5 2419.24,3819.69 C25.1@2419.24,3792.5 ; U3.1 2421.74,3736.63 C25.1
  other v2: 2369.5,3725 2447,3725
U5_63: SW1.2 U5.63 | length 348.3
  Top Layer w6: U5.63 2627,2430 v2(2637,2420)
  Bottom Layer w6: v2(2637,2420) 2807,2420 2852,2465 SW1.2
U5_64: SW1.1 U5.64 | length 224.6
  Top Layer w6: U5.64 2629.18,2449.68 v2(2637,2457.5)
  Bottom Layer w6: v2(2637,2457.5) 2732,2457.5 2752,2477.5 SW1.1
U7_1: R6.2 U7.1 | length 95.2
  Top Layer w10: U7.1 2587,3336.68 R6.2
U7_2: R5.2 U7.2 | length 95.5
  Top Layer w10: R5.2 2537,3329.63 U7.2
U11_6: 1UF.2 U11.6 | length 103.3
  Top Layer w10: U11.6 1UF.2
U11_13: D5.2 R31.1 U11.13 | length 1158.7
  Top Layer w6: R31.1 2555.5,1796 D5.2
  Top Layer w10: D5.2 2569.5,1795 v2(2599.5,1795)
  Top Layer w14: R31.1 2555.5,1796 D5.2
  Bottom Layer w10: v2(2599.5,1795) 2707,1795 2919.5,2007.5 3084.5,2172.5 3084.5,2262.5 3035.41,2311.59 v2(3035.41,2483.48)
U11_42: C5.2 U11.42 | length 338.7
  Top Layer w10: v2(3462,2457.5) 3467.51,2451.99 U11.42 ; v2(3519.5,2655) 3522,2657.5 C5.2
  Bottom Layer w10: v2(3462,2457.5) 3519.5,2515 v2(3519.5,2655)
VCC: C15.2 C16.2 C19.1 D4.1 IC1.7 IC2.7 pad.1 R27.1 VCC.1 | length 3546.8
  Top Layer w10: v2(2519.5,4080) 2549.5,4110 R27.1
  Top Layer w30: v2(2617,3662.5) v2(2669.49,3662.5) ; C16.2 2664.5,3667.49 v2(2669.49,3662.5) ; v2(2669.49,3529.76) v2(2669.49,3662.5) ; v2(3107.79,3665) v2(3164.5,3665) ; C15.2 3162.05,3667.45 v2(3164.5,3665) ; v2(3166.99,3529.76) 3166.99,3662.51 v2(3164.5,3665)
  Top Layer w48: D4.1 1978,4170 v2(2156.39,4170) v2(2284.52,4170)
  Top Layer w70: v2(2156.39,4170) 2156.39,4386.89 VCC.1
  Top Layer w100: v2(2156.39,4170) 2156.39,4386.89 VCC.1
  Bottom Layer w30: v2@2618.2,3662.5 v2(2669.49,3662.5) ; v2(3166.99,3529.76) v2@3166.99,3665
  Bottom Layer w48: v2(1972,4170) v2(2044.52,4170) v2(2156.39,4170) v2(2284.52,4170)
  Bottom Layer w60: pad.1 v2(2243.09,4170) v2(2284.52,4170) 2427,4170 2544.5,4052.5 2544.5,3677.5 2557,3665 v2(3107.79,3665) v2(3164.5,3665)
  Bottom Layer w100: pad.1 2159.5,4175 VCC.1
  other v1: 2154.5,4140 2124.5,4170 2184.5,4170 2154.5,4200 2159.5,4330 2129.5,4360 2189.5,4360 2129.5,4420 2189.5,4420 2159.5,4450
X2_1: C8.2 R6.1 X2.1 | length 178.6
  Top Layer w10: X2.1 2577,3432.86 R6.1 ; R6.1 C8.2
X2_2: C10.2 R5.1 X2.2 | length 178.7
  Top Layer w10: C10.2 2443.01,3409.42 R5.1 2537,3426.22 X2.2
XTAL_MEGA+: C27.2 R7.1 U5.34 X4.1 | length 436.5
  Top Layer w6: U5.34 2204.5,2129.55 2204.5,2070 2279.5,1995 2279.5,1972.5 2257.4,1950.4 X4.1 2324.1,1882.44 C27.2 2254.5,1807.5 R7.1
XTAL_MEGA-: C28.2 R7.2 U5.33 X4.3 | length 441.8
  Top Layer w6: X4.3 2080.69,1894.94 C28.2 2167,1807.5 R7.2 ; X4.3 2124.5,1992.5 2124.5,2010 2183.6,2069.1 U5.33
pads on no net: B2. BUZZER1.3 BUZZER1.4 IC1.4 IC2.4 U2.3 U2.5 U2.7 U2.9 U5.1 U5.4 U5.5 U5.8 U5.9 U5.14 U5.15 U5.16 U5.18 U5.23 U5.24 U5.25 U5.26 U5.27 U5.28 U5.29 U5.35 U5.36 U5.37 U5.38 U5.39 U5.40 U5.41 U5.42 U5.45 U5.46 U5.47 U5.48 U5.49 U5.50 U5.51 U5.52 U5.53 U5.54 U5.55 U5.56 U5.57 U5.58 U5.59 U5.60 U5.65 U5.66 U5.67 U5.68 U5.69 U5.70 U5.71 U5.72 U5.73 U5.74 U5.75 U5.76 U5.77 U5.78 U5.79 U5.82 U5.83 U5.84 U5.85 U5.86 U5.87 U5.88 U5.89 U5.90 U5.91 U5.92 U5.93 U5.94 U5.95 U5.96 U5.97 U7.3 U7.7 U11.1 U11.7 U11.8 U11.9 U11.10 U11.11 U11.22 U11.25 U11.26 U11.27 U11.31 U11.32 U11.33 U11.36 U11.37 U11.38 U11.39 U11.40 U11.41 USB1. USB1.1 USB1.4 X2.

## Polygon pours and split planes (outlines as drawn)
GND on Bottom Layer (solid): 3639,3416 1684,3416 1549,3551 1549,4386 1849,4686 3354,4686 3874,4166 3874,3541 3769,3436
GND on Bottom Layer (solid): 2212,1500 1724,1681 1547,2165 1547,3450 1587,3490 3797,3490 3936,3351 3936,1904 3532,1500 2212,1500
GND on Top Layer (solid): 3679,3413 1724,3413 1589,3548 1589,4383 1889,4683 3394,4683 3914,4163 3914,3538 3809,3433
GND on Top Layer (solid): 2165,1505 1677,1686 1500,2170 1500,3455 1540,3495 3750,3495 3889,3356 3889,1909 3485,1505 2165,1505

## Keep-outs
Keep-Out Layer:
  lines w10: 1812,1900 ccw(c1969.48,1900) 1969.48,1742.52 ; 1812,4340.94 cw(c1969.48,4340.95) 1969.48,4498.43 ; 3426.17,1742.52 ccw(c3426.17,1900) 3583.65,1900 ; 3426.17,4498.43 cw(c3426.17,4340.95) 3583.65,4340.94

## Other copper
Top Layer:
  rectangle net M-: 3144,3889 3364,4064
  rectangle net M+: 2762,3887.5 2982,4062.5

## Silkscreen, mask and mechanical layers (free items; w line width, h text height)
Bottom Overlay:
  lines w10 net S$30781: 1982,1870 2122,1870 2152,1900 2152,2105 2122,2135 1982,2135
  lines w10 net S$30783: 1967,2550 2127,2550 2152,2525 2152,2190 2152,2185 2122,2155 1977,2155
  lines w10 net S$30785: 1957,2690 2122,2690 2152,2660 2152,2605 2122,2575 1977,2575
  text "RX" at 2042,2988 h24
  text "TX" at 2042,2923 h24
  text "DTR" at 2067,2853 h24
  text "GND" at 2067,2783 h24
  text "START" at 2112,2708 h24
  text "STOP" at 2087,2643 h24
  text "GND" at 2067,2573 h24
  text "GND" at 2067,2503 h24
  text "+5V" at 2072,2433 h24
  text "CS" at 2047,2363 h24
  text "SCK" at 2067,2293 h24
  text "MOSI" at 2077,2223 h24
  text "Ch B" at 3377,2213 h24
  text "MISO" at 2077,2153 h24
  text "Ch A" at 3377,2138 h24
  text "GND" at 2067,2083 h24
  text "YELLOW" at 2137,2013 h24
  text "BLUE" at 2082,1948 h24
  text "+5V" at 2072,1878 h24

## Text inside footprints (layer, text, board x,y; h text height)
SW1: Bottom Overlay "ON" at 2834.24,2284.5 h30 r270; Bottom Overlay "ON" at 2734.24,2284.5 h30 r270